# Altium PCB GateDriver_MCU.PcbDoc
Units mil, origin at the board's own origin, x right, y up, seen from the top; angles counter-clockwise.
Board outline 2000 x 2000 mil, 4 copper layers (Top Layer, Signal Layer 1, GND, Bottom Layer), stack 30.634 mil thick; 85 components, 70 nets, 298 pads, 71 vias.
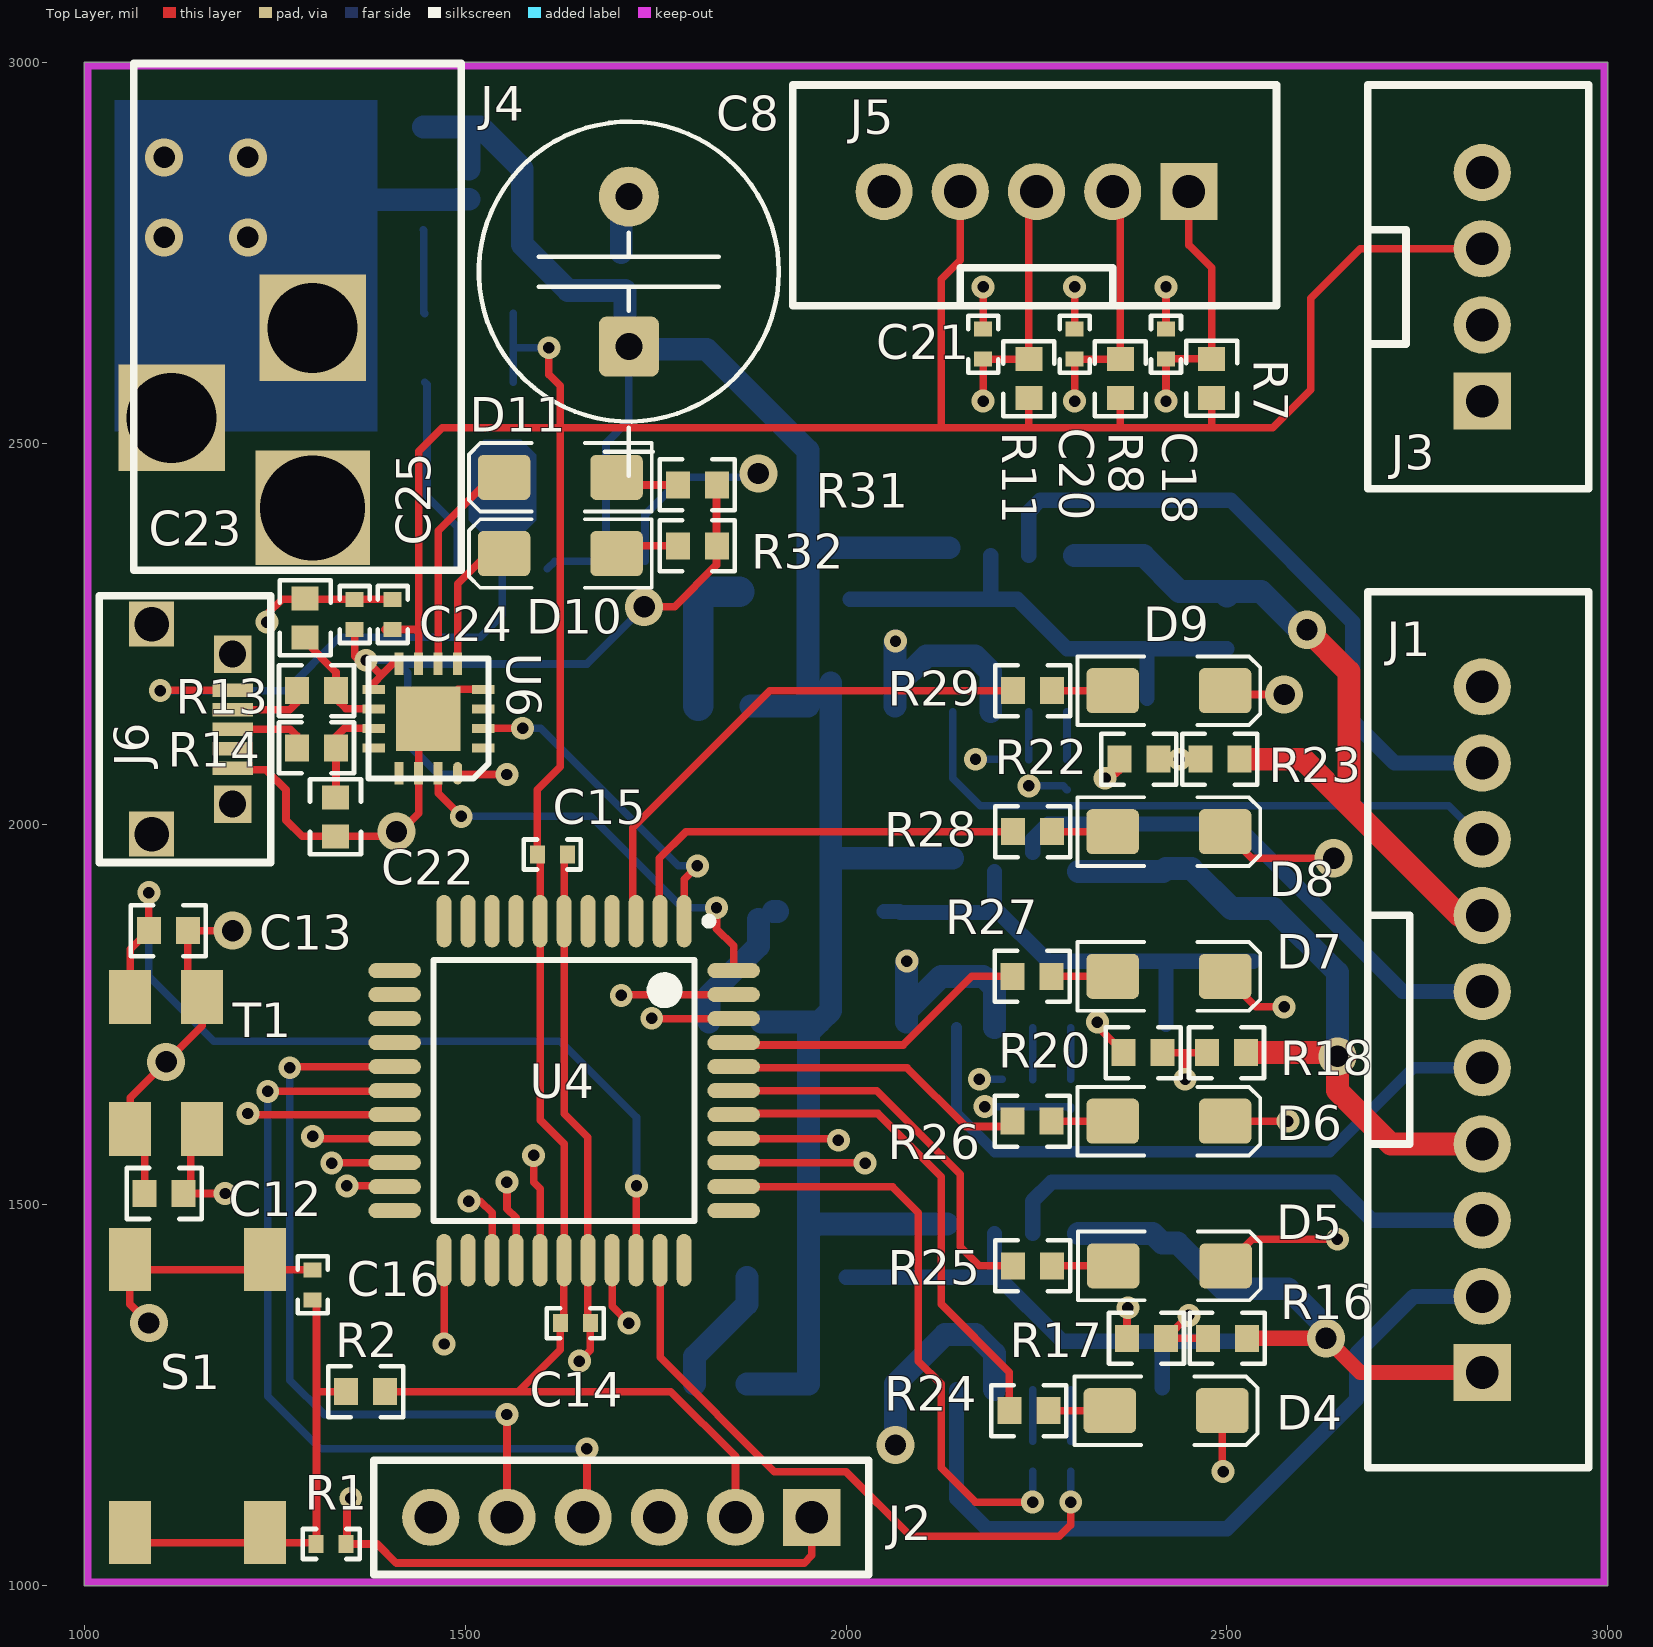
[diagram p0: Top Layer view]
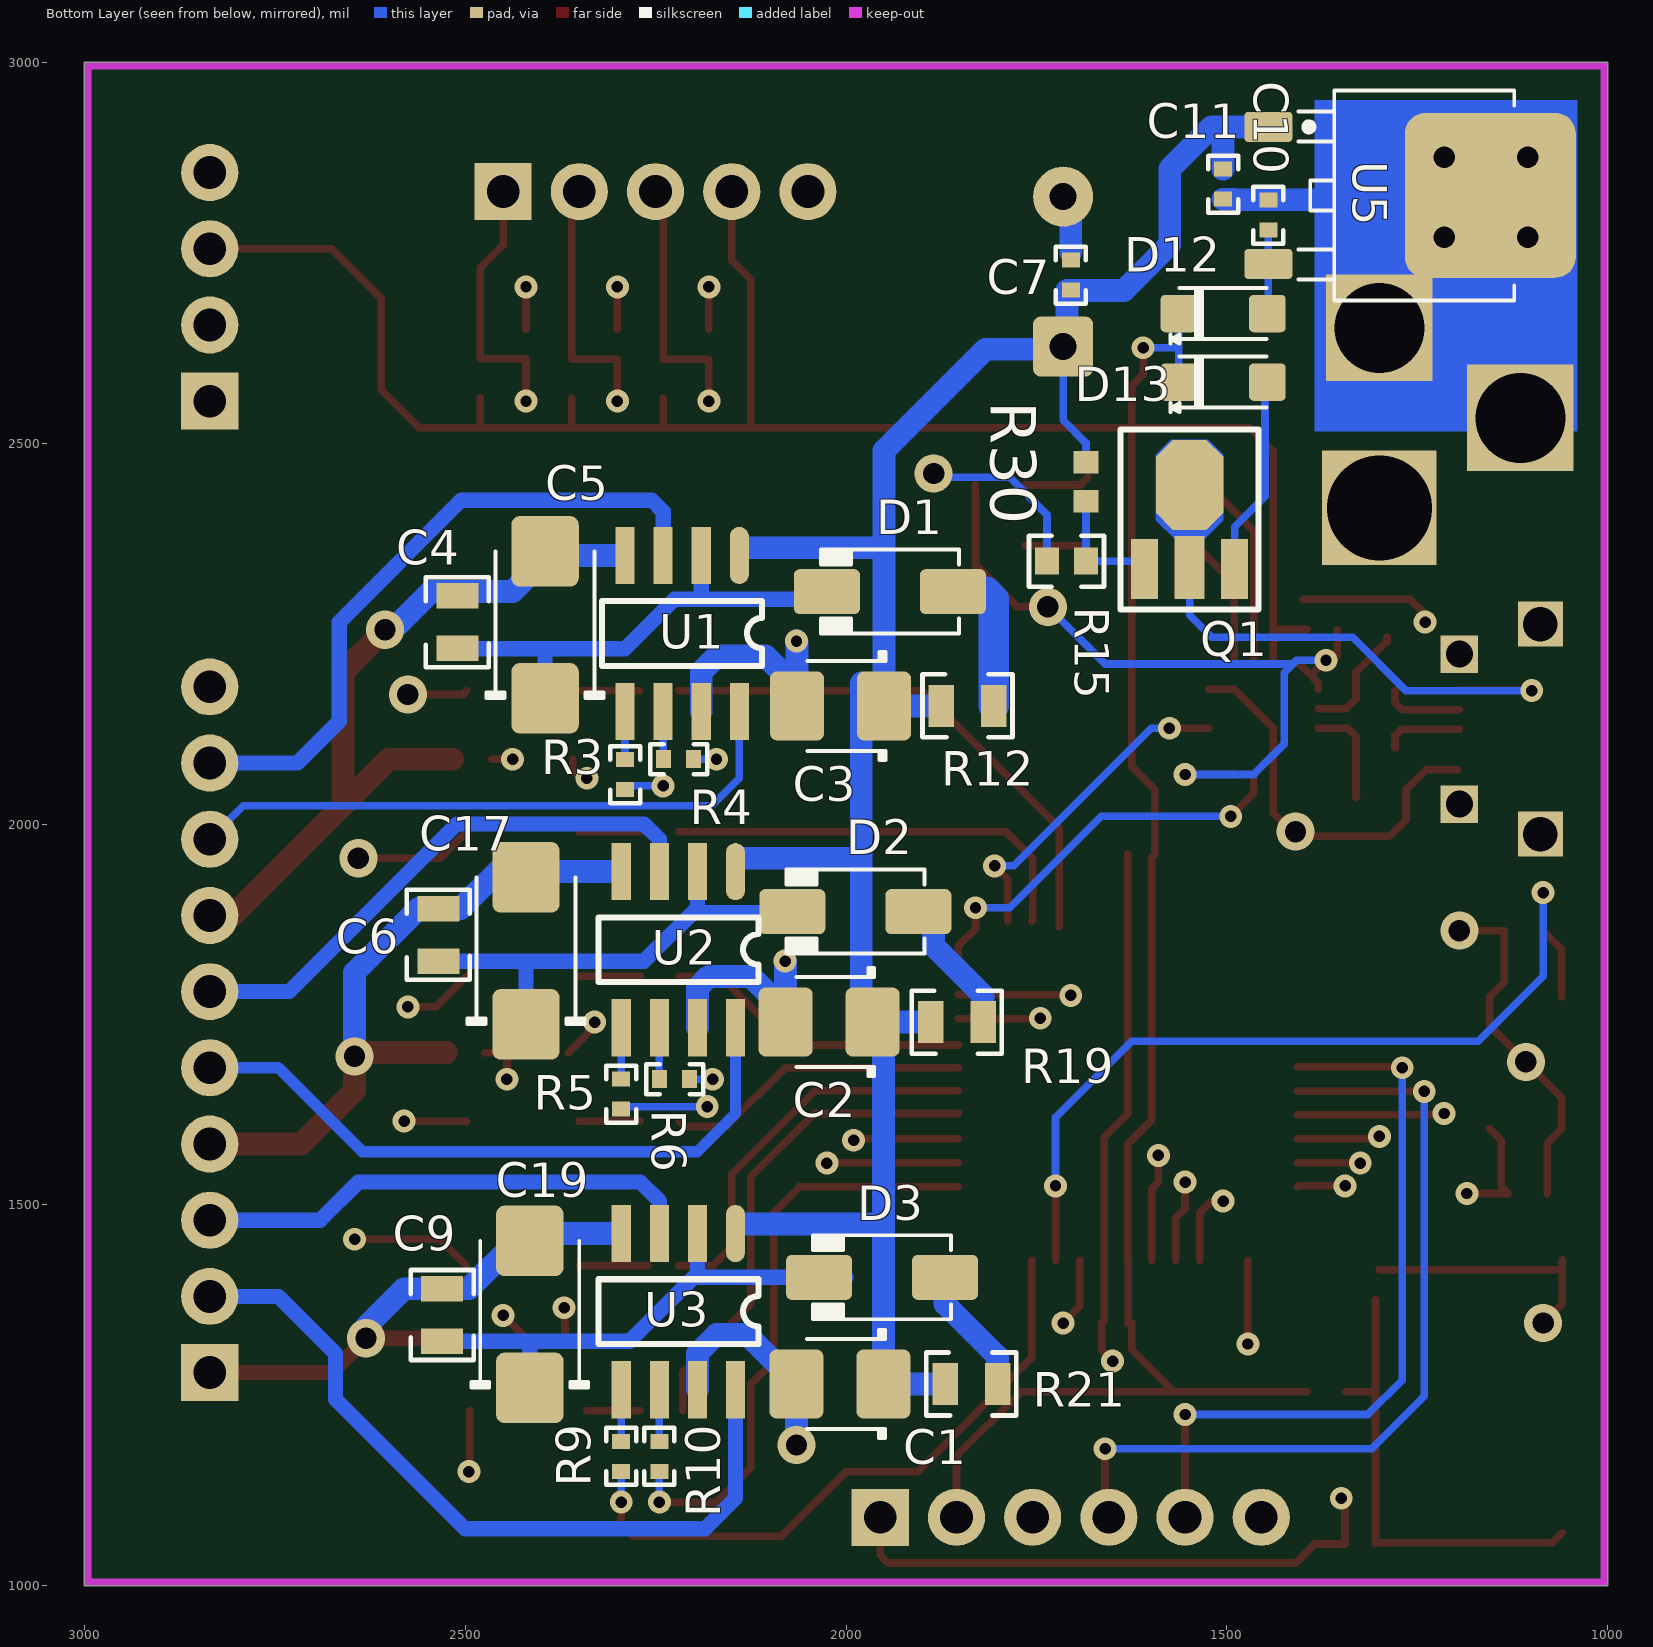
[diagram p1: Bottom Layer view, seen from below]
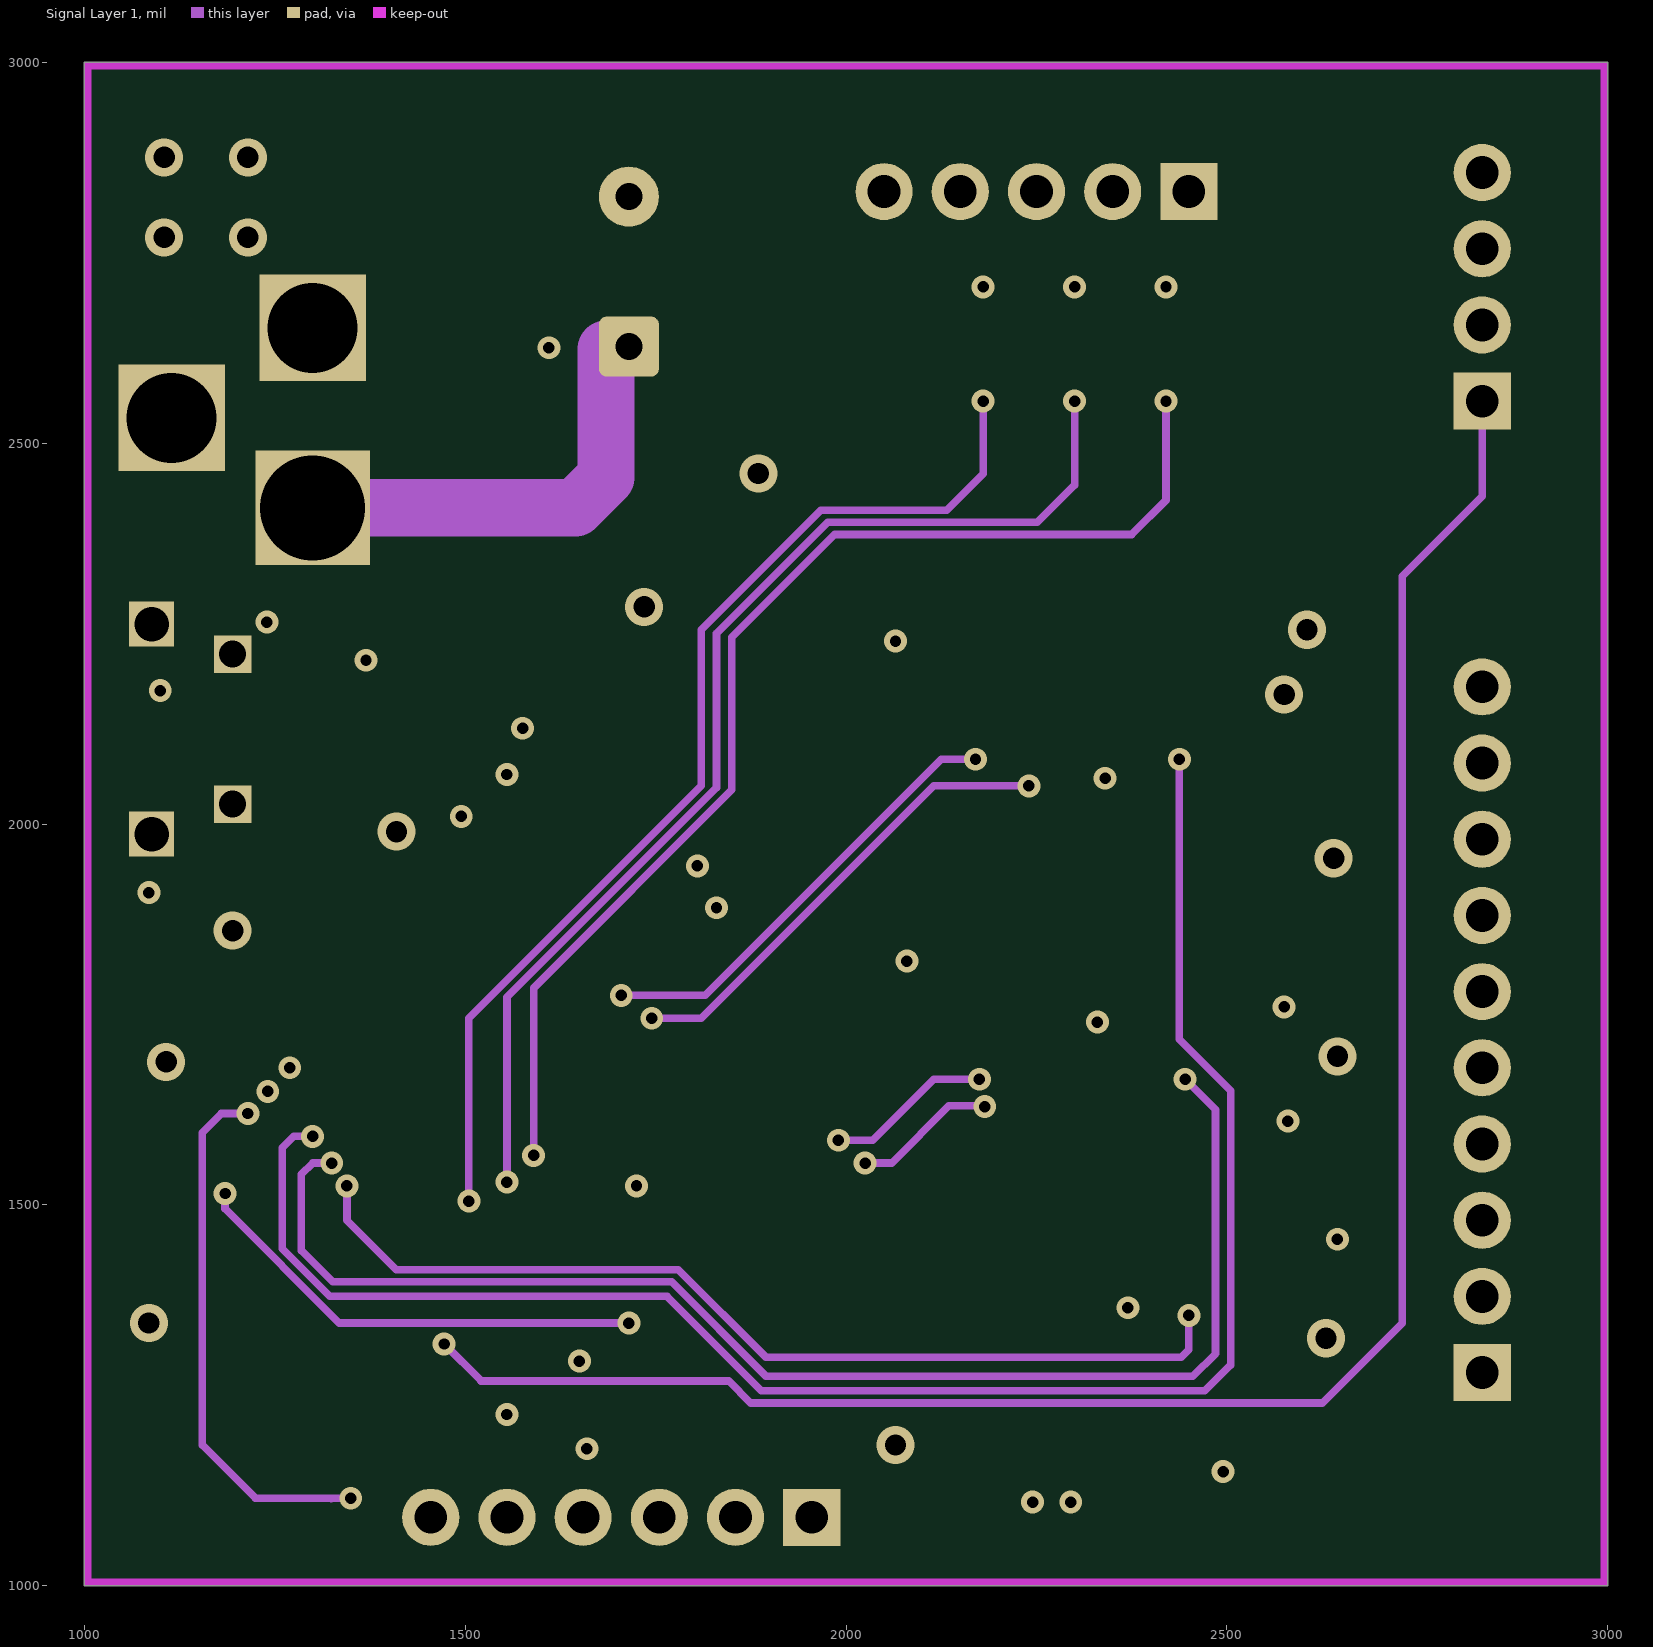
[diagram p2: Signal Layer 1]
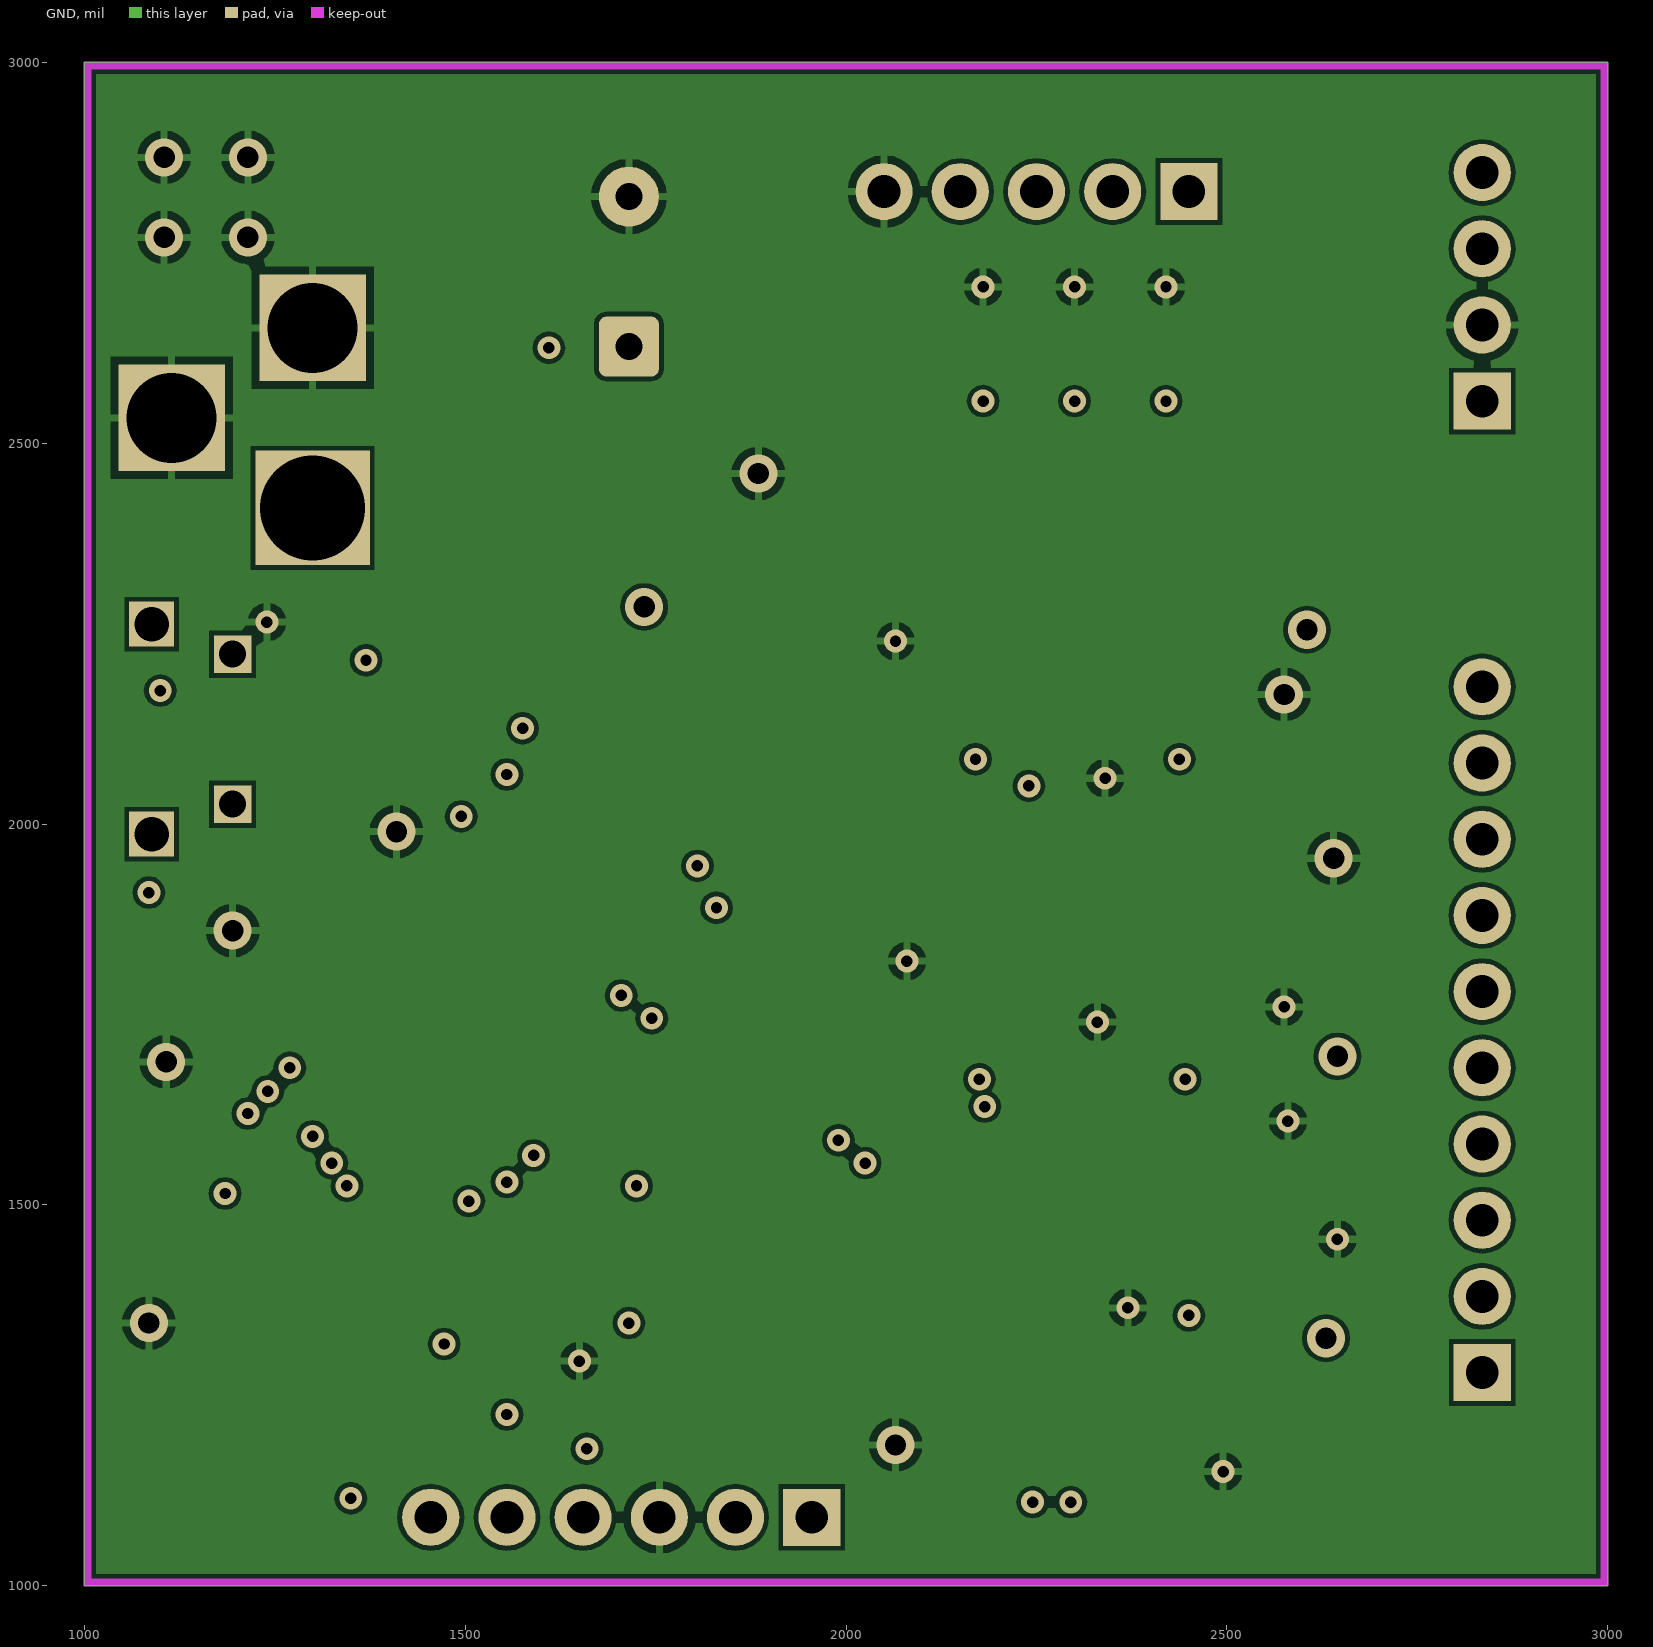
[diagram p3: GND]
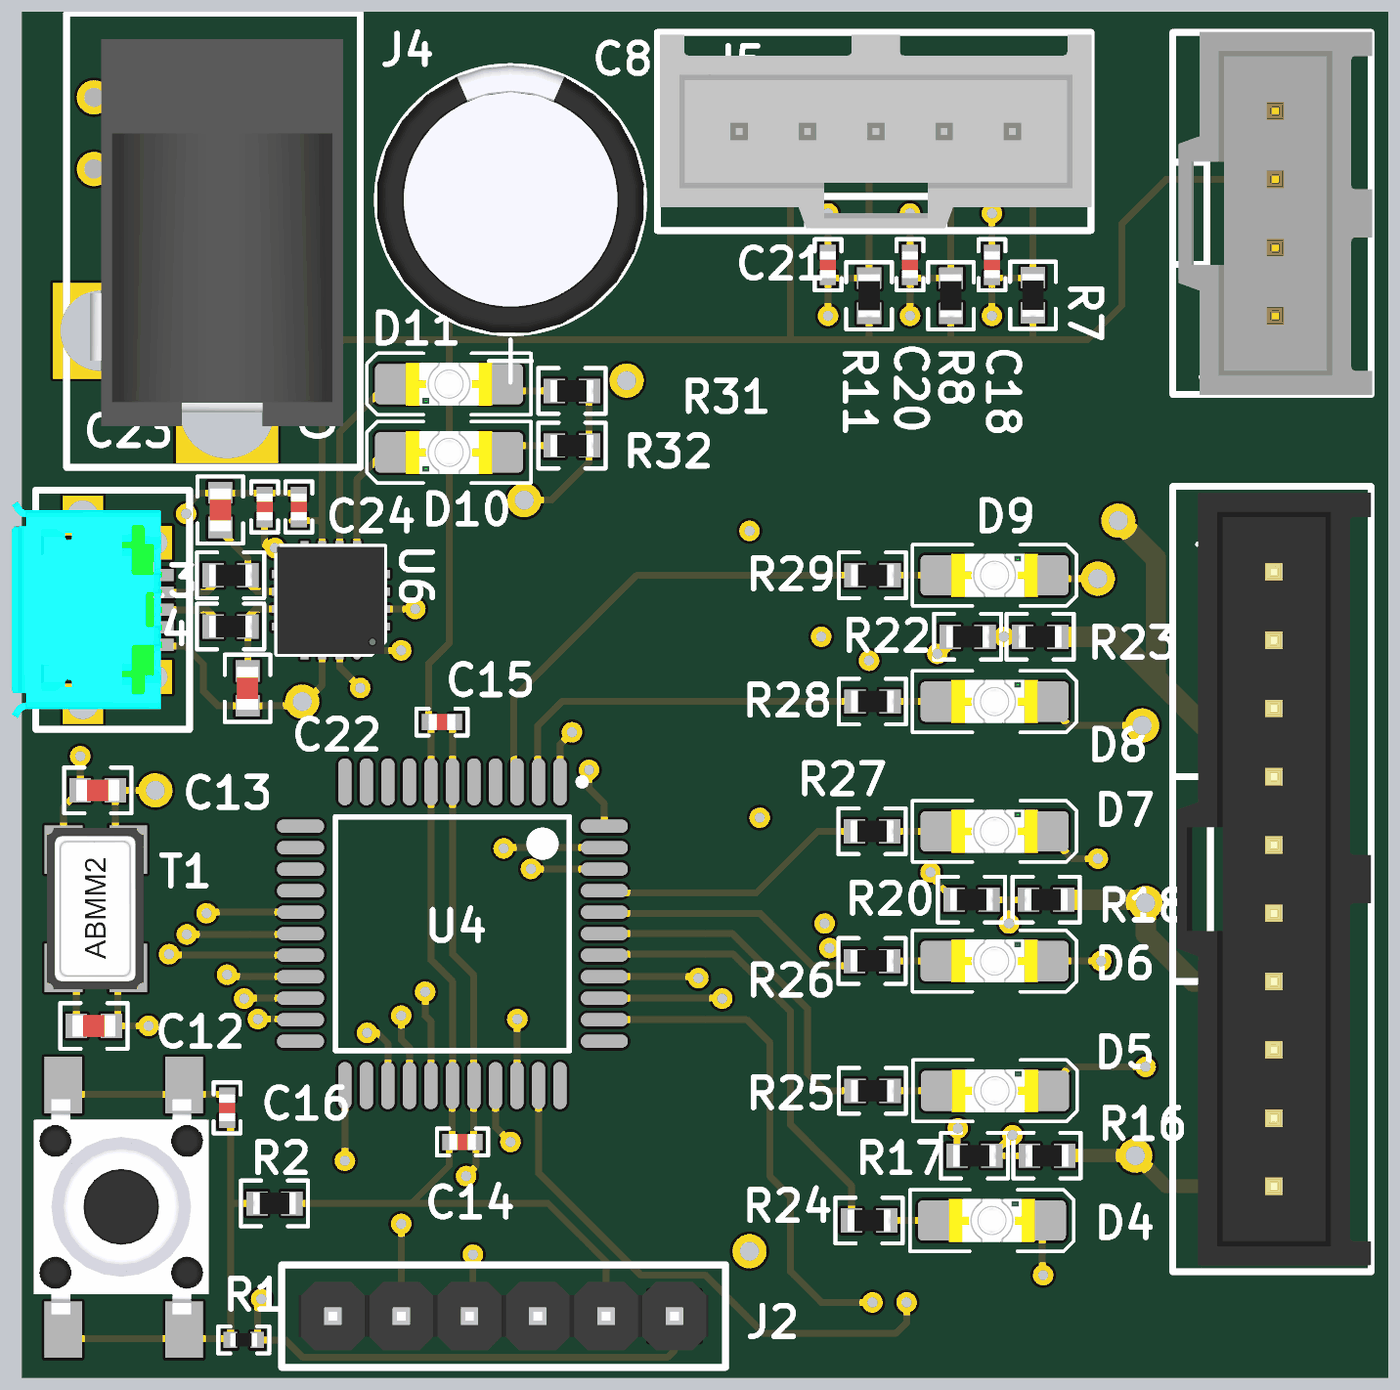
[diagram p4: 3D render of the assembled board from above, using the file's embedded part models]
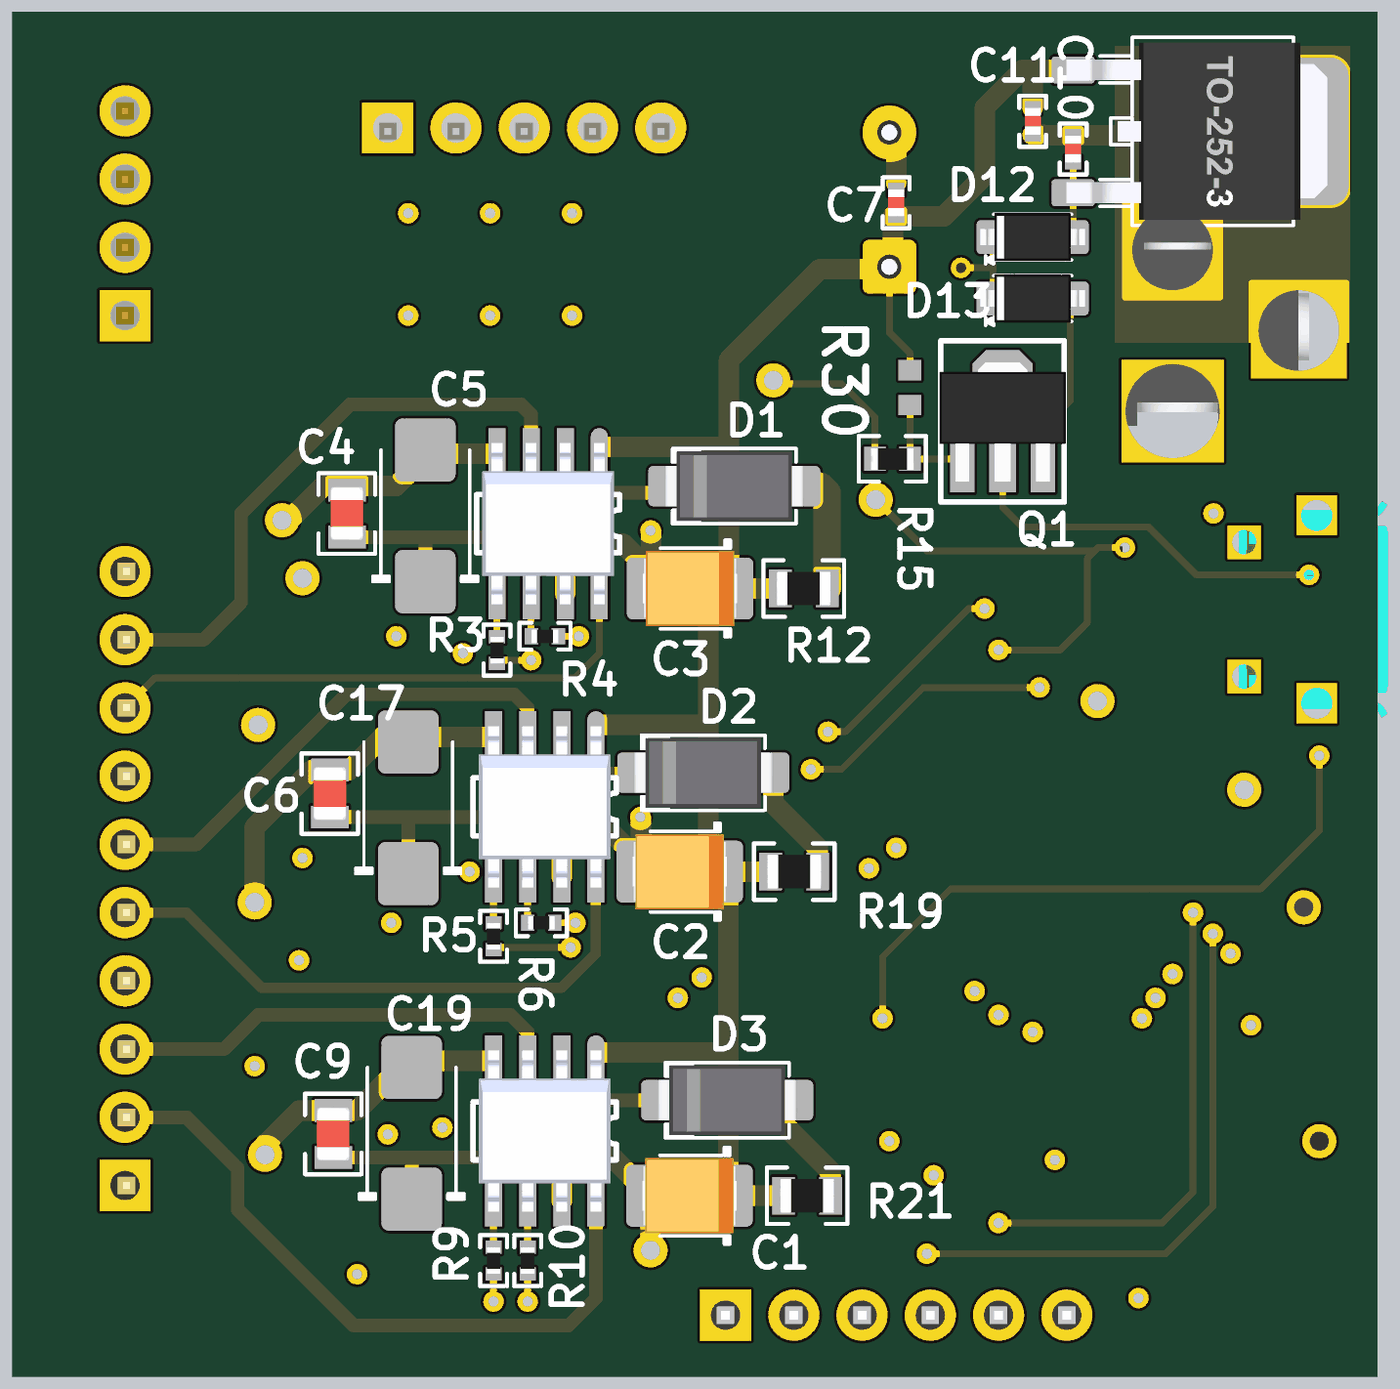
[diagram p5: 3D render of the assembled board from below, using the file's embedded part models]

## Layer stack, top to bottom
Top Solder: solder mask 0.4, Solder Resist, Dk 3.5
Top Layer: signal copper 1.4
Dielectric 1: core 10, FR-4, Dk 4.2
Signal Layer 1: signal copper 1.417
Dielectric 4: core 10, Dk 4.2
GND: signal copper 1.417
Dielectric 5: prepreg 5, Dk 4.2
Bottom Layer: signal copper 1.4
Bottom Solder: solder mask 0.4, Solder Resist, Dk 3.5

## Board outline
1000,1000 3000,1000 3000,3000 1000,3000

## Design rules (kind name [scope] priority, off if disabled: settings)
Clearance [All] p1: gap=6
HoleSize [All] p1: absolutevalues=TRUE maxlimit=200 minlimit=1 maxpercent=80.000 minpercent=20.000
MinimumSolderMaskSliver [All] p1: minsoldermaskwidth=6
PolygonConnect [All] p1: connectstyle=Relief reliefconductorwidth=10 reliefentries=4 polygonreliefangle="90 Angle" airgapwidth=10
RoutingVias [All] p1: holewidth=15 width=30 viastyle="Through Hole" minholewidth=13 minwidth=20 maxholewidth=28 maxwidth=50
SilkToSilkClearance [All] p1: silktosilkclearance=3
SilkToSolderMaskClearance [IsPad] p1: minsilkscreentomaskgap=3 clearancetoexposedcopper=TRUE
SolderMaskExpansion [All] p1: expansion=4
Width [All] p1: maxlimit=100 minlimit=6 preferedwidth=10
26 further rules are at their usual default settings.

## Classes and differential pairs
component class Gate-Driver: C1 C2 C3 C4 C5 C6 C7 C8 C9 C17 C19 D1 D2 D3 J1 J4 R3 R4 R5 R6 R9 R10 R12 R19 R21 U1 U2 U3
component class MotorMCU: C12 C13 C14 C15 C16 C18 C20 C21 D4 D5 D6 D7 D8 D9 J2 J3 J5 J? R1 R2 R7 R8 R11 R16 R17 R18 R20 R22 R23 R24 R25 R26 R27 R28 R29 S1 T1 U4
component class MCU-ADDON: C10 C11 C22 C23 C24 C25 D10 D11 D12 D13 J6 Q1 R13 R14 R15 R30 R31 R32 U5 U6

## Components (designator, comment, footprint, x,y, rotation, side; value= is the part's Value field where it differs from the comment)
C1 "T55B106M016C0200" CAPMP3528X210N 2007.91,1265 r0 bottom
C2 "T55B106M016C0200" CAPMP3528X210N 2022.09,1740 r0 bottom
C3 "T55B106M016C0200" CAPMP3528X210N 2007.09,2155 r0 bottom
C4 "1 uF" CAP-0805(2012)-R 2510,2265 r270 bottom
C5 "1 uF" CAPMP6032X280N 2395,2261.46 r90 bottom
C6 "1 uF" CAP-0805(2012)-R 2535,1854.45 r270 bottom
C7 "0.1 uF" CAP-0402(1005)-R 1705,2720.32 r90 bottom
C8 "10 uF" CAPE5.0mm 1715,2725 r90 top
C9 "1 uF" CAP-0805(2012)-R 2530,1355.55 r270 bottom
C10 "0.1 uF" CAP-0402(1005)-R 1505,2839.68 r270 bottom
C11 "0.1 uF" CAP-0402(1005)-R 1445.67,2799.02 r90 bottom
C12 "18 pF" CAP-0603(1608)-R 1105,1515 r180 top
C13 "18 pF" CAP-0603(1608)-R 1110.59,1860 r0 top
C14 "0.1 uF" CAP-0402(1005)-R 1644.68,1345 r0 top
C15 "0.1 uF" CAP-0402(1005)-R 1614.68,1960 r0 top
C16 "0.1 uF" CAP-0402(1005)-R 1300,1395 r270 top
C17 "1 uF" CAPMP6032X280N 2420,1833.54 r90 bottom
C18 "20 pF" CAP-0402(1005)-R 2420,2629.68 r90 top
C19 "1 uF" CAPMP6032X280N 2415,1356.46 r90 bottom
C20 "20 pF" CAP-0402(1005)-R 2300,2629.68 r90 top
C21 "20 pF" CAP-0402(1005)-R 2180,2629.68 r90 top
C22 "47 pF" CAP-0603(1608)-R 1330,2009.41 r270 top
C23 "47 pF" CAP-0603(1608)-R 1290,2270.59 r90 top
C24 "0.1 uF" CAP-0402(1005)-R 1405,2275 r90 top
C25 "0.1 uF" CAP-0402(1005)-R 1355,2275 r90 top
D1 "Value" DO-214AC 1942.32,2305 r0 bottom
D2 "Value" DO-214AC 1987.68,1885 r0 bottom
D3 "Value" DO-214AC 1952.68,1405 r0 bottom
D4 "Red" LED-1206 2420,1230 r0 top
D5 "Red" LED-1206 2424.41,1420 r0 top
D6 "Red" LED-1206 2423.82,1610 r0 top
D7 "Red" LED-1206 2423.82,1800 r0 top
D8 "Red" LED-1206 2423.82,1990 r0 top
D9 "Red" LED-1206 2423.82,2175 r0 top
D10 "Red" LED-1206 1625,2355 r180 top
D11 "Red" LED-1206 1625,2455 r180 top
D12 "MBR120VLSFT3G" SOD-123FL 1505,2670 r180 bottom
D13 "MBR120VLSFT3G" SOD-123FL 1505,2580 r180 bottom
J1 "Header 10 pin" HEADER-10-100MIL 2835,1280 r90 top
J2 "Header 6 pin" HEADER-6-100MIL 1955,1090 r180 top
J3 "Header 4 pin" HEADER-4-100MIL 2835,2555 r90 top
J4 "DC_Power-Jack" JACK_M 1114.96,2533.11 r90 top
J5 "Header 5 pin" HEADER-5-100MIL 2450,2830 r180 top
J6 "USB" USB_CONNECTOR_5P_MICRO_USB_FCI 1195,2124.41 r270 top
Q1 "DN3525" SOT89-3 1549.06,2399.96 r90 bottom
R1 "1 kOhms" R-0402(1005)-R 1324.37,1055 r180 top
R2 "10 kOhms" R-0603(1608)-R 1369.41,1255 r0 top
R3 "100 Ohms" R-0402(1005)-R 2290,2064.68 r90 bottom
R4 "100 Ohms" R-0402(1005)-R 2219.68,2085 r0 bottom
R5 "100 Ohms" R-0402(1005)-R 2295,1645.32 r90 bottom
R6 "100 Ohms" R-0402(1005)-R 2225,1665 r0 bottom
R7 "820 Ohms" R-0603(1608)-R 2480,2585 r90 top
R8 "820 Ohms" R-0603(1608)-R 2360,2584.41 r90 top
R9 "100 Ohms" R-0402(1005)-R 2295,1170 r90 bottom
R10 "100 Ohms" R-0402(1005)-R 2245,1170 r90 bottom
R11 "820 Ohms" R-0603(1608)-R 2240,2584.41 r90 top
R12 "10 Ohms" R-0805(2012)-R 1840.55,2155 r0 bottom
R13 "27 Ohms" R-0603(1608)-R 1305,2175 r180 top
R14 "27 Ohms" R-0603(1608)-R 1305,2100 r180 top
R15 "10 kOhms" R-0603(1608)-R 1710.59,2345 r180 bottom
R16 "750 Ohms" R-0603(1608)-R 2500.59,1325 r0 top
R17 "220 Ohms" R-0603(1608)-R 2394.41,1325 r180 top
R18 "750 Ohms" R-0603(1608)-R 2499.41,1700 r0 top
R19 "10 Ohms" R-0805(2012)-R 1854.45,1740 r0 bottom
R20 "220 Ohms" R-0603(1608)-R 2390,1700 r180 top
R21 "10 Ohms" R-0805(2012)-R 1835.55,1265 r0 bottom
R22 "220 Ohms" R-0603(1608)-R 2384.41,2085 r180 top
R23 "750 Ohms" R-0603(1608)-R 2490.59,2085 r0 top
R24 "60.4 Ohms" R-0603(1608)-R 2240,1230 r180 top
R25 "60.4 Ohms" R-0603(1608)-R 2245,1420 r180 top
R26 "60.4 Ohms" R-0603(1608)-R 2244.41,1610 r180 top
R27 "60.4 Ohms" R-0603(1608)-R 2244.41,1800 r180 top
R28 "60.4 Ohms" R-0603(1608)-R 2245,1990 r180 top
R29 "60.4 Ohms" R-0603(1608)-R 2245,2175 r180 top
R30 "10k" RES0603X055L 1685,2449.41 r270 bottom
R31 "60.4 Ohms" R-0603(1608)-R 1805,2445 r180 top
R32 "60.4 Ohms" R-0603(1608)-R 1805,2365 r180 top
S1 "PB_Switch" PUSHBUTTON_SWITCHES 1060,1070 r180 top
T1 "8MHz" CRYSTAL-8MHZ 1107.76,1686.61 r90 top
U1 "IRS2011" SOIC-8 2215,2250 r0 bottom
U2 "IRS2011" SOIC-8 2220,1835 r0 bottom
U3 "IRS2011" SOIC-8 2220,1360 r0 bottom
U4 "PIC16F917T-I/PT" TQFP-44 1630,1650 r270 top
U5 "FIXED 5V" TO-252 1300,2825 r270 bottom
U6 "FT230XQ-R" QFN-16 1451.85,2138.39 r270 top

## Footprints (in the part's own frame and the unit in brackets; to place one, negate y for a bottom-side part, rotate by r counter-clockwise, add the part's x,y. Pads: shape width x height; smd on the part's side, far side on the other; paste and mask are expansions set on the pad)
CAP-0402(1005)-R [mm] "Capacitor 0402 Reflow"
  rect 0.5x0.6 smd: 1(-0.5,0) 2(0.5,0)
  silkscreen extent -0.95,-0.5 0.95,0.5, body extent -0.5,-0.3 0.5,0.3, height 0.2
CAP-0603(1608)-R [mm] "Capacitor 0603(1608) Reflow"
  rect 0.8x0.9 smd: 1(-0.65,0) 2(0.65,0)
  silkscreen extent -1.25,-0.85 1.25,0.85, body extent -0.8,-0.4 0.8,0.4, height 0.3
CAP-0805(2012)-R [mm] "Capacitor 0805(2012) Reflow"
  rect 0.85x1.4 smd: 1(-0.875,0) 2(0.875,0)
  silkscreen extent -1.5,-1.05 1.5,1.05, body extent -1,-0.63 1,0.63, height 0.78
CAPE5.0mm [mm]
  rrect25% 2x2 hole 0.9: 1(-2.5,0)
  round 2 hole 0.9: 2(2.5,0)
  silkscreen extent -6.8,-5 5,5, body extent -4.96,-4.97 4.95,4.96, height 20
CAPMP3528X210N [mm] "Molded body capacitor, Body 3.5x2.8mm, 1210, IPC Nominal settings"
  round 0.254 on Mech14: 0(0,0)
  rrect25% 1.8x2.3 smd: 1(-1.45,0) 2(1.45,0)
  Top Layer pour cut-out: -0.508,1.27 0.508,1.27 0.508,-1.27 -0.508,-1.27
  silkscreen extent -1.5,-1.8 1.1,1.8, body extent -1.75,-1.4 1.75,1.4, height 2.1
CAPMP6032X280N [mm] "Capacitor, polarized, Molded Body, EIA 535BAAC size C; 6.00mm L X 3.20mm W X 2.80mm H"
  round 0.508 on Mech14: 0(0,0)
  rrect25% 2.35x2.25 smd: 1(-2.45,0) 2(2.45,0)
  silkscreen extent -2.45,-1.95 2.45,1.95, body extent -3,-1.6 3,1.6, height 2.8
CRYSTAL-8MHZ [mm] "ABRACON ABMM2-8.000MHZ-E2-T"
  rect 1.8x1.4 smd: 1(-2.2,-1.2) 2(-2.2,1.2) 2(2.2,-1.2) 3(2.2,1.2)
  body extent -3,-1.78 3,1.82, height 1.21
DO-214AC [mm] "JEDEC DO214 variation AC. SMA"
  round 0.508 on Mech14: 0(0,0)
  rrect25% 2.2x1.5 smd: A(-2.1,0) K(2.1,0)
  silkscreen extent -2.3,-1.4 2.3,1.4, body extent -2.6,-1.3 2.6,1.3, height 2.42
HEADER-4-100MIL [mil] "100 mil spacing"
  rect 75x75 hole 43: 1(0,0)
  round 75 hole 43: 2(100,0) 3(200,0) 4(300,0)
  silkscreen extent -115,-140 415,150, body extent -116,-142 416,142, height 431
HEADER-5-100MIL [mil] "100 mil spacing"
  rect 75x75 hole 43: 1(0,0)
  round 75 hole 43: 2(100,0) 3(200,0) 4(300,0) 5(400,0)
  silkscreen extent -115,-140 520,150, body extent -116,-137 516,147, height 431
HEADER-6-100MIL [mil] "100 mil spacing"
  rect 75x75 hole 43: 1(0,0)
  round 75 hole 43: 2(100,0) 3(200,0) 4(300,0) 5(400,0) 6(500,0)
  silkscreen extent -75,-75 575,75, body extent -50,-50 550,50, height 339
HEADER-10-100MIL [mil] "100 Mil Pitch"
  rect 75x75 hole 43: 1(0,0)
  round 75 hole 43: 2(100,0) 3(200,0) 4(300,0) 5(400,0) 6(500,0) 7(600,0) 8(700,0) 9(800,0) 10(900,0)
  silkscreen extent -125,-140 1025,150, body extent -116,-140 1016,144, height 421
JACK_M [mm] "Jack_2.5A_16V_Through_Hole"
  rect 3.81x3.81 hole 3.5: 1(-3,-4.7)
  rect 3.556x3.556 hole 3: 2(3,-4.7) 3(0,0)
  silkscreen extent -5.08,-9.65 11.81,1.27, body extent -3.56,-9.02 10.84,0.38, height 11
LED-1206 [mm]
  round 0.508 on Mech14: 0(0,0)
  rrect25% 1.75x1.5 smd: A(-1.875,0) K(1.875,0)
  silkscreen extent -3.05,-1.14 3.05,1.14, body extent -1.6,-0.8 1.6,0.8, height 1.11
PUSHBUTTON_SWITCHES [mm]
  rect 1.4x2.1 smd: 1(-4.5,0) 1(0,0) 2(-4.5,-9.1) 2(0,-9.1)
  body extent -5.41,-8.57 1.09,-0.57, height 7
QFN-16 [mm]
  oval 0.75x0.3 smd: 1(1.825,0.975)
  rect 0.75x0.3 smd: 2(1.825,0.325) 3(1.825,-0.325) 4(1.825,-0.975) 9(-1.825,-0.975) 10(-1.825,-0.325) 11(-1.825,0.325) 12(-1.825,0.975)
  rect 0.3x0.75 smd: 5(0.975,-1.825) 6(0.325,-1.825) 7(-0.325,-1.825) 8(-0.975,-1.825) 13(-0.975,1.825) 14(-0.325,1.825) 15(0.325,1.825) 16(0.975,1.825)
  rect 2.15x2.15 smd: 17(0,0)
  silkscreen extent -2,-2 2,2, body extent -2,-2 2,2, height 0.92
R-0402(1005)-R [mm] "Resistor 0402(1005)-Reflow"
  rect 0.5x0.6 smd: 1(-0.5,0) 2(0.5,0)
  silkscreen extent -0.95,-0.5 0.95,0.5, body extent -0.5,-0.25 0.5,0.25, height 0.3
R-0603(1608)-R [mm] "Resistor 0603(1608) Reflow"
  rect 0.8x0.9 smd: 1(-0.65,0) 2(0.65,0)
  silkscreen extent -1.25,-0.85 1.25,0.85, body extent -0.8,-0.4 0.8,0.4, height 0.45
R-0805(2012)-R [mm] "Resistor 0805(2012) Reflow"
  rect 0.85x1.4 smd: 0(0.875,0) 1(-0.875,0)
  silkscreen extent -1.5,-1.05 1.5,1.05, body extent -1,-0.63 1,0.62, height 0.5
RES0603X055L [mm] "Chip Resistor, 2-Leads, Body 1.60x0.85mm, IPC High Density"
  rect 0.75x0.85 smd: 1(-0.65,0) 2(0.65,0)
  body extent -0.88,-0.48 0.87,0.48, height 0.55
SOD-123FL [mm] "SOD-123FL; 2 Leads; Body 2.7 x 1.6 mm, (LxW)"
  round 0.508 on Mech14: 0(0,0)
  rrect25% 1.22x1.25 smd: A(1.475,0) K(-1.475,0)
  silkscreen extent -1.75,-1 1.45,0.85, body extent -1.95,-0.9 1.95,0.9, height 1.18
SOIC-8 [mil] "8 LEAD SOIC"
  oval 25x75 smd: 1(-75,-102.5)
  rect 25x75 smd: 2(-25,-102.5) 3(25,-102.5) 4(75,-102.5) 5(75,102.5) 6(25,102.5) 7(-25,102.5) 8(-75,102.5)
  silkscreen extent -105,-42 105,42, body extent -96,-118 96,118, height 69
SOT89-3 [mm] "JEDEC TO-243 option AA / SOT89"
  round 1 on Mech14: 0(0,0)
  rrect1% 2x0.9 smd: 1(-1.65,1.5) 3(-1.65,-1.5)
  rrect1% 2.1x1 smd: 2(-1.6,0)
  oct 3x2.25 smd: 2(1.15,0)
  Top Layer region: -0.7,-0.45 -0.025,-1.125 2.15,-1.125 2.65,-0.625 2.65,0.625 2.15,1.125 -0.025,1.125 -0.7,0.45
  silkscreen extent -3,-2.3 3,2.3, body extent -2.25,-2.35 2.2,2.35, height 1.69
TO-252 [mm] "D-PAK/TO-252-AA; 3 Leads (1 Cropped); Body 10.3 (inc. leads) x 6.7 mm (LxW max)"
  round 0.5 on Mech14: 0(0,0)
  rrect25% 1x1.6 smd: 1(-2.285,-3.7) 3(2.285,-3.7)
  rrect25% 5.5x5.7 smd: 4(0,3.7)
  silkscreen extent -3.5,-2.7 3.5,4.5, body extent -3.3,-3.95 3.3,5.76, height 2.31
TQFP-44 [mm] "44-Pin Thin Quad Flat Pack 0.8 mm Pitch, IPC Medium Density"
  oval 1.75x0.5 smd: 1(-5.65,4) 2(-5.65,3.2) 3(-5.65,2.4) 4(-5.65,1.6) 5(-5.65,0.8) 6(-5.65,0) 7(-5.65,-0.8) 8(-5.65,-1.6) 9(-5.65,-2.4) 10(-5.65,-3.2) 11(-5.65,-4) 23(5.65,-4) 24(5.65,-3.2) 25(5.65,-2.4) 26(5.65,-1.6) 27(5.65,-0.8) 28(5.65,0) 29(5.65,0.8) 30(5.65,1.6) 31(5.65,2.4) 32(5.65,3.2) 33(5.65,4)
  oval 0.5x1.75 smd: 12(-4,-5.65) 13(-3.2,-5.65) 14(-2.4,-5.65) 15(-1.6,-5.65) 16(-0.8,-5.65) 17(0,-5.65) 18(0.8,-5.65) 19(1.6,-5.65) 20(2.4,-5.65) 21(3.2,-5.65) 22(4,-5.65) 34(4,5.65) 35(3.2,5.65) 36(2.4,5.65) 37(1.6,5.65) 38(0.8,5.65) 39(0,5.65) 40(-0.8,5.65) 41(-1.6,5.65) 42(-2.4,5.65) 43(-3.2,5.65) 44(-4,5.65)
  silkscreen extent -5.77,-4.35 4.35,4.95, body extent -5,-5 5,5, height 1.2
USB_CONNECTOR_5P_MICRO_USB_FCI [mm] "USB_Connector_5P_MICRO_USB_FCI_TypeB"
  rect 0.45x1.35 smd: 1(-1.3,0) 2(-0.65,0) 3(0,0) 4(0.65,0) 5(1.3,0)
  rect 1.25x1.25 hole 0.9: 15(2.5,0) 16(-2.5,0)
  rect 1.5x1.5 hole 1.15: 18(-3.5,-2.7) 18(3.5,-2.7)
  silkscreen extent -4.44,-4.45 4.45,1.27, body extent -4.02,-5.33 4.02,0.25, height 2.73

## Part data
C1 C2 C3: library part CAP-10uF-63V-TANTB-TC-B, "CAP TANT, 10uF, 16V, TANT-B"
C4 C6 C9: library part "CAP- 1 uF- 50 V-CER-0805(2012)", "CAP CER 1 UF 50V 10% Y5V 0805"
C5 C17 C19: library part CAP-1uF-63V-TANTB-TC-C, "CAP, 1uF, 63V, TANT-B"
C7 C10 C11 C14 C15 C16 C24 C25: library part "CAP- 0.1 uF- 16 V-CER-0402(1005)", "CAP CER 0.1 UF 16V 5% X7R 0402"
C8: library part CAP-10uF-25V-ALC, "CAP, 10uF, 25V, ALC, 20%"
C12 C13: library part "CAP- 18 pF- 25 V-CER-0603(1608)", "CAP CER 18 pF 10V 5% C0G 0603"
C18 C20 C21: library part "CAP- 20 pF- 50 V-CER-0402(1005)", "CAP CER 20 pF 50V 5% C0G 0402"
C22 C23: library part "CAP- 47 pF- 50 V-CER-0603(1608)", "CAP CER 47 pF 50V 5% C0G 0603"
D1 D2 D3: library part DIODE-ES1D, "DIODE, ES1D Fairchild"
D4 D5 D6 D7 D8 D9 D10 D11: library part LED_SMD_RED_0805, "LED, 0805 SMD, Red"
D12 D13: library part DIODE_SCHOTTKY, "Diode Schottky SMD 20V 1A SMD"
J1: library part CON-10Pin-100Mil, "Header, 10pin, .1 pitch"
J2: library part CON-6Pin-100Mil, "Header, 6 pin, .1 pitch"
J3: library part CON-4Pin-100Mil, "Header, 4 pin, .1 pitch"
J5: library part CON-5Pin-100Mil, "Header, 5 pin, .1 pitch"
J6: "USB_Connector_5P_MICRO_USB_FCI"
Q1: library part DN3525N8-G, "MOSFET N-Channel DEPLETION SMD"
R1: library part "R-1K-62.5 mW-0402(1005)", "RES 1K OHM 62.5 mW 0402(1005) SMD"
R2 R15: library part R-10k-100mW-0603, "RES 10k OHM 1/10W 0603 SMD"
R3 R4 R5 R6 R9 R10: library part "R-100-62.5 mW-0402(1005)", "RES 100 OHM 62.5 mW 0402(1005) SMD"
R7 R8 R11: library part R-820-100mW-0603(1608), "RES 820 OHM 100 mW 0603(1608) SMD"
R12 R19 R21: library part R-10-125mW-0805, "RES 10 OHM 1/8W 0805 SMD"
R13 R14: library part "R-27-100 mW-0603", "RES 27 OHM 100 mW  SMD"
R16 R18 R23: library part R-750-100mW-0603(1608), "RES 750 OHM 100 mW 0603(1608) SMD"
R17 R20 R22: library part "R-220-100 mW-0603(1608)", "RES 220 OHM 100 mW 0603(1608) SMD"
R24 R25 R26 R27 R28 R29 R31 R32: library part R-60.4-100mW-0805, "RES 60.4 OHM 100 mW  SMD"
R30: library part RES_0603, "Resistor"
T1: library part CRYSTAL_8MHz, "Oscillator Crystal 8MHz 10ppm"
U1 U2 U3: library part IRS2011(S)PBF, "IC, HS/LS INDEPENDENT DRIVER"
U4: library part PIC16F917, "Flash-Based, 8-Bit CMOS Microcontroller with LCD Driver and nanoWatt Technology, 8K (x14-Bit words) Program Memory, 608 Bytes Data Memory, 35 I/O pins, 44-Pin TQFP, Standard VDD Range, Industrial Temperature, Tape and Reel"
U5: library part MC78M05CDTRKG, "Voltage Regulator IC, DPAK SMD, MC78M05CDTRKG"
U6: "USB to Basic UART Interface Chip, UHCI/OHCI/EHCI Compatible, USB 2.0 Compatible, -40 to +85 degC, 16-Pin QFN, Pb-Free, Tape and Reel"

## Via types
v1: diameter 30, hole 15, Top Layer to Bottom Layer, 55 vias
v2: diameter 50, hole 28, Top Layer to Bottom Layer, 16 vias

## Nets (pads, with @x,y where several pads share a name; then routed paths per layer and width w, separated by ;. In a path a pad name is that pad's centre, name@x,y a point inside that pad or via, vN(x,y) a via of type N, cw(c..) or ccw(c..) an arc to the next point about the centre after c; other vN are vias at no path point)
3.3V: C25.1 R31.1 R32.1 U6.1 U6.8 U6.9 | length 1087.2
  Top Layer w10: C25.1@1355,2255 1355,2220 1365,2210 v1(1370,2215) 1387.38,2197.62 1392.62,2197.62 ; U6.8 1380,2185 1392.62,2197.62 ; U6.9 1405.24,2210.24 1392.62,2197.62 ; U6.1 1491.77,2065 v1(1555,2065) ; v2(1735,2285) 1775,2285 1830,2340 1830,2430.59 1830.59,2430 R31.1
  Bottom Layer w10: v1@1375,2215 v1(1370,2215) 1408.7,2215 1413.7,2210 ; v1(1555,2065) 1465,2065 1425,2105 1425,2198.7 1413.7,2210 ; v2(1735,2285) 1660,2210 1413.7,2210
5V: C14.1 C15.1 C24.1 D12.K D13.K J2.2 J3.3 J5.4 R2.2 R7.1 R8.1 R11.1 U4.7 U4.28 U6.10 | length 4471.7
  Top Layer w10: R2.2 1570,1255 ; C24.1@1395,2255.32 1434.68,2255.32 1439.06,2250.94 ; U6.10 1439.06,2250.94 ; C15.1 1595,2045 1625,2075 1625,2520 ; C15.1@1598.5,1956.5 U4.7 1598.5,1611.5 1630,1580 1630,1427.87 1629.69,1427.56 1629.69,1349.69 1629.98,1345.33 C14.1@1630,1345 ; v1(1610,2625) 1610,2590 1625,2575 1625,2520 ; C14.1 1625,1310 1570,1255 ; J2.2 1855,1170 1770,1255 1570,1255 ; J5.4 2150,2740 2125,2715 2125,2520 ; 2240,2520 R11.1 ; R8.1 2360,2520 ; 2480,2520 R7.1 ; J3.3 2675,2755 2610,2690 2610,2570 2560,2520 2360,2520 ; 1439.06,2250.94 1439.06,2489.06 1470,2520 1625,2520 ; 1625,2520 2125,2520 ; 2125,2520 2360,2520
  Bottom Layer w10: D13.K 1563.07,2625 ; D12.K 1563.07,2625 ; v1(1610,2625) 1563.07,2625
CLK_IN: C12.1 T1.1 U4.30 | length 853.3
  Top Layer w10: T1.1 1140,1585 1140,1524.41 C12.1 v1(1185,1515) ; U4.30 1692.99,1367.01 v1(1715,1345)
  Signal Layer 1 w10: v1(1185,1515) 1185,1495 1335,1345 v1(1715,1345)
CLK_OUT: C13.1 T1.3 U4.31 | length 1161.2
  Top Layer w10: T1.3 1060.51,1835.51 C13.1 v1(1085,1910) ; U4.31 1724.49,1524.49 v1(1725,1525)
  Bottom Layer w10: v1(1085,1910) 1085,1800 1170,1715 1625,1715 1725,1615 v1(1725,1525)
GND: C1.2 C2.2 C3.2 C7.2 C8.2 C10.2 C11.2 C12.2 C13.2 C14.2 C15.2 C16.1 C18.2 C20.2 C21.2 C22.2 C23.2 C24.2 C25.2 D4.K D5.K D6.K D7.K D8.K D9.K J2.3 J3.2 J4.2 J4.3 J5.5 J6.5 R15.1 R17.2 R20.2 R22.2 S1.2 T1.2 U1.7 U2.7 U3.7 U4.6 U4.29 U5.4 U6.3 U6.13 U6.17 | length 4718.6
  Top Layer w10: S1.2@1060,1428.27 S1.2@1060,1415 ; C12.2 1079.41,1581.1 1060.51,1600 1060.51,1640.51 1155,1735 1155,1773.23 1136.18,1792.05 C13.2 v2(1195,1860) ; v2(1085,1345) 1060,1370 S1.2@1060,1415 ; J6.5@1196.94,2071.28 1238.72,2071.28 1265,2045 1265,2005 1286.18,1983.82 C22.2 1403.82,1983.82 v2(1410,1990) 1415,1990 1439.06,2014.06 U6.3 1439.06,2125.59 U6.17 1490.24,2176.77 U6.13 ; v1(1240,2265) 1240,2275 1260,2295 1399.37,2295 C24.2@1400,2294.37 ; C16.1@1300,1415 S1.2@1060,1415 ; C15.2@1630,1960 U4.6 1630,1620 1661.18,1588.82 1661.18,1348.19 C14.2 1664.37,1309.37 v1(1650,1295) ; C21.2 v1(2180,2705) ; C20.2 v1(2300,2705) ; v1(2330,1740) 2330,1734.41 R20.2 ; v1(2340,2060) 2347.64,2060 2357.64,2070 2358.82,2070 R22.2 ; R17.2 2368.82,1363.82 v1(2370,1365) ; C18.2 v1(2420,2705) ; D4.K 2493.82,1151.18 v1(2495,1150) ; D7.K 2537.64,1760 v1(2575,1760) ; D8.K 2532.64,1955 v2(2640,1955) ; D9.K 2502.64,2170 v2(2575,2170) ; D5.K 2533.23,1455 v1(2645,1455) ; D6.K@2498.23,1609.41 D6.K v1(2580,1610)
  Bottom Layer w10: R15.1 1736.18,2406.18 1785,2455 1880,2455 v2(1885,2460)
  Bottom Layer w30: U5.4 1159.96,2819.37 1489.37,2819.37 1490,2820 C10.2 ; 1705,2750 1705,2820 C8.2@1714.94,2819.84 ; J2.3 J2.3@1765,1100 ; v2(2065,1185) C1.2 2130,1330 2170,1330 2195,1305 U3.7 ; v1(2065,2240) 2064.17,2239.17 C3.2 2064.17,2179.17 2105.83,2220.83 2169.17,2220.83 2190,2200 U1.7 ; v1(2080,1820) 2079.17,1819.17 C2.2 2079.17,1754.17 2125,1800 2180,1800 2195,1785 U2.7
  other v2: 1107.76,1687.76 1105,2770 1215,2770 1105,2875 1215,2875
H1_M: J1.9 U1.3 | length 877.8
  Bottom Layer w20: U1.3 2240,2410 2255,2425 2505,2425 2665,2265 2665,2135 2720,2080 J1.9
H2_M: J1.6 U2.3 | length 706.7
  Bottom Layer w20: U2.3@2245,1962.5 2245,1980 2265,2000 2510.91,2000 2730.46,1780.46 ; 2730.46,1780 J1.6
H3_M: J1.3 U3.3 | length 663.6
  Bottom Layer w20: U3.3 2245,1505 2270,1530 2640,1530 2690,1480 J1.3
ICSPCLK: J2.5 U4.16 | length 986.8
  Top Layer w10: v1(1270,1680) 1271.5,1681.5 U4.16 ; J2.5 v1(1555,1225)
  Bottom Layer w10: v1(1270,1680) 1270,1270 1315,1225 v1(1555,1225)
ICSPDAT: J2.4 U4.17 | length 1117.8
  Top Layer w10: v1(1241,1649) 1406.56,1649 U4.17 ; J2.4 1650,1095 1660,1105 v1(1660,1180)
  Bottom Layer w10: v1(1241,1649) 1241,1249 1310,1180 v1(1660,1180) v1@1660,1187
L1_M: J1.8 U1.8 | length 815.8
  Bottom Layer w10: U1.8 2140,2060 2176,2024 2250.77,2024 2250.93,2024.16 2790.84,2024.16 J1.8
L2_M: J1.5 U2.8 | length 868.8
  Bottom Layer w15: U2.8 2145,1620 2195,1570 2635,1570 2745,1680 J1.5
L3_M: J1.2 U3.8 | length 1010.6
  Bottom Layer w20: U3.8 2145,1115 2185,1075 2500,1075 2670,1245 2670,1305 2745,1380 J1.2
MCLR: J2.1 R1.1 U4.18 | length 1657.3
  Top Layer w10: v1@1216.5,1618.5 U4.18 ; v1@1345,1114.37 1345,1055 1385,1055 1410,1030 1945,1030 1955,1040 J2.1
  Signal Layer 1 w10: v1@1216.5,1618.5 v1(1215,1620) 1180,1620 1155,1595 1155,1185 1225,1115 v1(1350,1115) 1325,1115 1324.37,1114.37
NetC4_2: C4.2 C5.1 D1.K U1.2 | length 644.1
  Bottom Layer w20: D1.K@2005.35,2295 2190,2295 ; U1.2 2190,2295 ; C5.1 2395,2230 ; C4.2@2500,2230 2395,2230 ; 2190,2295 2225,2295 2290,2230 2395,2230
NetC6_2: C6.2 C17.1 D2.K U2.2 | length 647.3
  Bottom Layer w20: D2.K@2050,1885 D2.K 2071.35,1884 2189,1884 2195,1890 ; U2.2 2195,1890 ; C17.1 2420,1820 ; C6.2 2420,1820 ; 2195,1890 2265,1820 2420,1820
NetC9_2: C9.2 C19.1 D3.K U3.2 | length 680.4
  Bottom Layer w20: D3.K@2000,1405 D3.K 2195,1405 ; U3.2 2195,1410 2283.9,1321.1 2415,1321.1 ; C19.1 2415,1321.1 ; C9.2 2415,1321.1
NetC16_2: C16.2 R1.2 R2.1 S1.1 | length 609.3
  Top Layer w10: S1.1@1060,1070 1073.27,1056.73 R1.2@1305,1056.73 ; R1.2@1305,1055.32 C16.2@1305,1375.32 ; 1305,1255 R2.1
NetD1_A: D1.A R12.1 | length 197.7
  Bottom Layer w40: R12.1 1806.1,2295 1816.1,2305 D1.A
NetD2_A: D2.A R19.1 | length 166.9
  Bottom Layer w30: R19.1 1820,1775 1885,1840 D2.A@1885,1875 ; D2.A D2.A@1910,1885
NetD3_A: D3.A R21.1 | length 168.5
  Bottom Layer w30: R21.1 1801.1,1301.1 1870,1370 D3.A
NetD4_A: D4.A R24.1 | length 70
  Top Layer w10: R24.1@2270,1230 D4.A@2340,1230
NetD5_A: D5.A R25.1 | length 89.4
  Top Layer w10: R25.1@2260,1420 R25.1 D5.A@2349.41,1420
NetD6_A: D6.A R26.1 | length 80
  Top Layer w10: R26.1 D6.A
NetD7_A: D7.A R27.1 | length 80
  Top Layer w10: R27.1 D7.A
NetD8_A: D8.A R28.1 | length 79.4
  Top Layer w10: R28.1 D8.A
NetD9_A: D9.A R29.1 | length 79.4
  Top Layer w10: R29.1 D9.A
NetD10_A: D10.A R32.2 | length 85.9
  Top Layer w10: D10.A@1682.64,2355 1692.64,2365 R32.2@1764.41,2365
NetD10_K: D10.K U6.12 | length 182.4
  Top Layer w10: U6.12 1490.24,2315.24 1530,2355 D10.K
NetD11_A: D11.A R31.2 | length 85.9
  Top Layer w10: D11.A@1682.64,2455 1692.64,2445 R31.2@1764.41,2445
NetD11_K: D11.K U6.11 | length 290.1
  Top Layer w10: U6.11 1464.65,2384.65 1535,2455 D11.K
NetD13_A: D13.A Q1.3 | length 262.8
  Bottom Layer w10: D13.A 1450.04,2576.89 1450.04,2429.96 1490,2390 Q1.3
NetJ6_2: J6.2 R13.2 | length 103.9
  Top Layer w10: J6.2 1270,2150 1279.41,2159.41 R13.2
NetJ6_3: J6.3 R14.2 | length 103.7
  Top Layer w10: J6.3 1270.59,2124.41 1279.41,2115.59 R14.2
NetQ1_1: Q1.1 R15.2 R30.2 | length 159.9
  Bottom Layer w10: Q1.1 1618.11,2345 R15.2 R30.2
NetR3_1: R3.1 U4.42 | length 781.1
  Top Layer w10: v1(1745,1745) 1745.51,1744.49 U4.42
  Signal Layer 1 w10: v1(1745,1745) 1810,1745 2115,2050 v1(2240,2050)
  Bottom Layer w10: v1(2240,2050) 2285,2050 R3.1
NetR3_2: R3.2 U1.5 | length 63.1
  Bottom Layer w10: R3.2 U1.5
NetR4_1: R4.1 U4.43 | length 771.3
  Top Layer w10: v1(1705,1775) 1705.98,1775.98 U4.43
  Signal Layer 1 w10: v1(1705,1775) 1815,1775 2125,2085 v1(2170,2085)
  Bottom Layer w10: v1(2170,2085) R4.1
NetR4_2: R4.2 U1.6 | length 63.1
  Bottom Layer w10: R4.2@2240,2084.37 U1.6
NetR5_1: R5.1 U4.36 | length 475.1
  Top Layer w10: U4.36 2024.49,1555.51 v1(2025,1555)
  Signal Layer 1 w10: v1(2025,1555) 2060,1555 2135,1630 2181.07,1630 v1(2182.07,1629)
  Bottom Layer w10: v1(2182.07,1629) R5.1@2295,1629 ; R5.1@2294.37,1625 R5.1
NetR5_2: R5.2 U2.5 | length 67.5
  Bottom Layer w10: R5.2 U2.5
NetR6_1: R6.1 U4.37 | length 386.8
  Top Layer w10: U4.37 1987.99,1587.01 v1(1990,1585)
  Signal Layer 1 w10: v1(1990,1585) 2035,1585 2115,1665 v1(2175,1665)
  Bottom Layer w10: v1(2175,1665) R6.1
NetR6_2: R6.2 U2.6 | length 67.8
  Bottom Layer w10: R6.2@2245,1664.68 U2.6
NetR9_1: R9.1 U4.32 | length 840.4
  Top Layer w10: U4.32@1756,1427.54 1756,1300 1906,1150 2000,1150 2085,1065 2280,1065 2295,1080 v1(2295,1110)
  Bottom Layer w10: v1(2295,1110) R9.1
NetR9_2: R9.2 U3.5 | length 67.8
  Bottom Layer w10: R9.2 U3.5
NetR10_1: R10.1 U4.35 | length 783
  Top Layer w10: U4.35 2060.98,1524.02 2095,1490 2095,1295 2125,1265 2125,1155 2170,1110 v1(2245,1110)
  Bottom Layer w10: v1(2245,1110) R10.1
NetR10_2: R10.2 U3.6 | length 67.8
  Bottom Layer w10: R10.2 U3.6
NetR24_2: R24.2 U4.38 | length 651
  Top Layer w10: U4.38@1852.44,1620 2042.01,1620 2125,1537.01 2125,1370 2214.41,1280.59 R24.2
NetR25_2: R25.2 U4.39 | length 518.1
  Top Layer w10: U4.39 2040.29,1650 2150,1540.29 2150,1445 2175,1420 R25.2
NetR26_2: R26.2 U4.40 | length 401.2
  Top Layer w10: U4.40@1852.44,1680 2080,1680 2157,1603 2211.82,1603 R26.2
NetR27_2: R27.2 U4.41 | length 403.7
  Top Layer w10: U4.41@1852.44,1710 2075,1710 2165,1800 R27.2
NetR28_2: R28.2 U4.2 | length 561.9
  Top Layer w10: U4.2 1755,1873.43 1755,1955 1790,1990 R28.2
NetR29_2: R29.2 U4.3 | length 704
  Top Layer w10: U4.3@1720,1865 1720,1995 1900,2175 R29.2
NetU4_1: U4.1 U6.15 | length 435.9
  Top Layer w10: U6.15 v1(1575.59,2125.59) ; U4.1 1787.48,1927.48 v1(1805,1945)
  Bottom Layer w10: v1(1575.59,2125.59) 1599.41,2125.59 1780,1945 v1(1805,1945)
NetU4_44: U4.44 U6.2 | length 545.6
  Top Layer w10: U6.2 1464.65,2040.35 v1(1495,2010) ; v1(1830,1890) 1830,1862.44 1852.44,1840 U4.44
  Bottom Layer w10: v1(1495,2010) 1665,2010 1785,1890 v1(1830,1890)
SENSEA: C18.1 J5.1 R7.2 U4.27 | length 2050.3
  Top Layer w10: v1(1590,1565) 1590,1530 1598.5,1521.5 U4.27 ; v1(2420,2555) C18.1 2420.59,2610.59 R7.2 2480,2730 2450,2760 J5.1
  Signal Layer 1 w10: v1(1590,1565) 1590,1784.75 1850,2044.75 1850,2245 1985,2380 2375,2380 2420,2425 v1(2420,2555)
SENSEB: C20.1 J5.2 R8.2 U4.26 | length 1941.2
  Top Layer w10: v1(1555,1530) 1555,1495 1567.01,1482.99 U4.26 ; v1(2300,2555) C20.1 R8.2 2360,2820 J5.2
  Signal Layer 1 w10: v1(1555,1530) 1555,1772.37 1830,2047.37 1830,2250 1976,2396 2251,2396 2300,2445 v1(2300,2555)
SENSEC: C21.1 J5.3 R11.2 U4.25 | length 1864.3
  Top Layer w10: v1(1505,1505) 1520,1505 1535.51,1489.49 U4.25 ; v1(2180,2555) C21.1 R11.2 2240,2820 J5.3
  Signal Layer 1 w10: v1(1505,1505) 1505,1745 1810,2050 1810,2255 1967,2412 2132,2412 2180,2460 v1(2180,2555)
USB_5V: J6.1 Q1.2 | length 648.2
  Top Layer w10: v1(1100,2175) 1100.59,2175.59 J6.1
  Bottom Layer w10: v1(1100,2175) 1265,2175 1335,2245 1520,2245 1549.06,2274.06 Q1.2@1549.06,2336.97
USBDM: C23.1 R13.1 U6.7 | length 152.3
  Top Layer w10: C23.1 1290,2240 1330.59,2199.41 R13.1 1330.59,2164.41 1343.82,2151.18 U6.7
USBDP: C22.1 R14.1 U6.6 | length 133.7
  Top Layer w10: C22.1 1330.59,2035.59 R14.1 1330.59,2114.41 1341.77,2125.59 U6.6
V_SHUNT: J3.1 U4.23 | length 2696.7
  Top Layer w10: v1(1472.5,1317.5) U4.23
  Signal Layer 1 w10: v1(1472.5,1317.5) 1521,1269 1846,1269 1875,1240 2625,1240 2730,1345 2730,2325 2835,2430 J3.1
VB1: C4.1 C5.2 J1.7 R23.2 U1.4 | length 1010.5
  Top Layer w30: R23.2 2600,2085 2660,2025 ; v2(2605,2255) 2660,2200 2660,2025 ; J1.7 2805,1880 2660,2025
  Bottom Layer w30: U1.4@2300,2352.5 2390.41,2352.5 2437.91,2305 2545,2305 2595,2255 v2(2605,2255) ; C4.1@2500,2298.9 C4.1@2506.1,2305
VB2: C6.1 C17.2 J1.4 R18.2 U2.4 | length 894.2
  Top Layer w30: R18.2 2640,1700 v2(2645,1695) 2645,1650 2715,1580 J1.4
  Bottom Layer w30: U2.4@2305,1937.5 2416.04,1937.5 2420,1941.46 2453.54,1941.46 2506.1,1888.9 C6.1 2561.1,1888.9 2645,1805 v2(2645,1695)
VB3: C9.1 C19.2 J1.1 R16.2 U3.4 | length 718.2
  Top Layer w20: R16.2 v2(2630,1325) 2675,1280 J1.1
  Bottom Layer w30: U3.4@2305,1462.5 2402.5,1462.5 2415,1450 2435,1450 2495,1390 C9.1 2580,1390 2630,1340 v2(2630,1325)
VCC: C1.1 C2.1 C3.1 C7.1 C8.1 C10.1 J4.1 R12.0 R19.0 R21.0 R30.1 U1.1 U2.1 U3.1 U5.1 | length 3636.7
  Signal Layer 1 w75: J4.1@1266.22,2415 1645,2415 1685,2455 C8.1@1685,2623.15
  Bottom Layer w10: R30.1 1685,2500 1715,2530 1715,2623.15 C8.1
  Bottom Layer w30: U5.1 1505,2914.96 ; C10.1 1505,2914.96 ; R21.0 C1.1 1950.83,1465 ; R12.0 C3.1 1950,2362.5 ; R19.0 C2.1 ; C3.1@1980,2185 1980,1955 ; U3.1@2132.5,1475 1960.83,1475 1950.83,1465 ; U1.1@2135,2362.5 1950,2362.5 ; U2.1@2140,1955 1980,1955 ; 1505,2914.96 1520.04,2914.96 1575,2860 1575,2760.63 1635.32,2700.32 1710,2700.32 1710,2623.15 1715,2623.15 1816.85,2623.15 1950,2490 1950,2362.5 ; 1950.83,1465 1950.83,1725.83 C2.1 ; C2.1 1980,1755 1980,1955
VL1: R22.1 R23.1 U4.19 | length 2474.2
  Top Layer w10: v1(1300,1590) 1302.99,1587.01 U4.19 ; v1(2437.5,2085) R23.1
  Signal Layer 1 w10: v1(1300,1590) 1275,1590 1260,1575 1260,1442.63 1322.63,1380 1765,1380 1889,1256 2471,1256 2505,1290 2505,1650 2437.5,1717.5 v1(2437.5,2085)
VL2: R18.1 R20.1 U4.20 | length 1979.5
  Top Layer w10: v1(1325,1555) 1325.51,1555.51 U4.20 ; R20.1 2444.7,1700 ; v1(2445,1665) 2445,1699.7 2444.7,1700 ; R18.1 2444.7,1700
  Signal Layer 1 w10: v1(1325,1555) 1300,1555 1285,1540 1285,1440.25 1326.25,1399 1771,1399 1895,1275 2455,1275 2485,1305 2485,1625 v1(2445,1665)
VL3: R16.1 R17.1 U4.21 | length 1434.1
  Top Layer w10: v1(1345,1525) 1406.57,1525 U4.21 ; v1(2450,1355) R17.1 R16.1
  Signal Layer 1 w10: v1(1345,1525) 1345,1480 1410,1415 1780,1415 1895,1300 2440,1300 2450,1310 v1(2450,1355)
VREG: C11.1 D12.A U5.3 | length 110.8
  Bottom Layer w10: C11.1@1445,2780 C11.1 U5.3 1445.67,2671.26 D12.A
pads on no net: C1.0 C2.0 C3.0 C5.0 C17.0 C19.0 D1.0 D2.0 D3.0 D4.0 D5.0 D6.0 D7.0 D8.0 D9.0 D10.0 D11.0 D12.0 D13.0 J1.10 J2.6 J3.4 J6.4 J6.15 J6.16 J6.18 Q1.0 U4.4 U4.5 U4.8 U4.9 U4.10 U4.11 U4.12 U4.13 U4.14 U4.15 U4.22 U4.24 U4.33 U4.34 U5.0 U6.4 U6.5 U6.14 U6.16

## Polygon pours and split planes (outlines as drawn)
GND on GND "GND Plane" (solid, remove dead copper, pour order 0): 1005,2995 2995,2995 2995,1005 1005,1005

## Keep-outs
Keep-Out Layer:
  lines w10: 1005,1005 2995,1005 2995,2995 1005,2995 1005,1005

## Other copper
Bottom Layer:
  rectangle net GND: 1040,2515 1385,2950